# EAGLE board LineSensorAdapter (EAGLE 6.6.0)
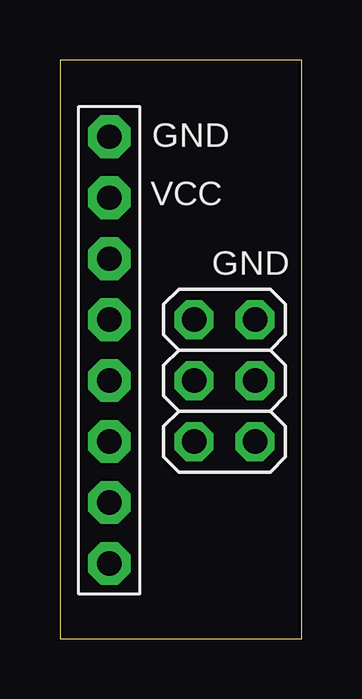
[diagram p0: board, top side]
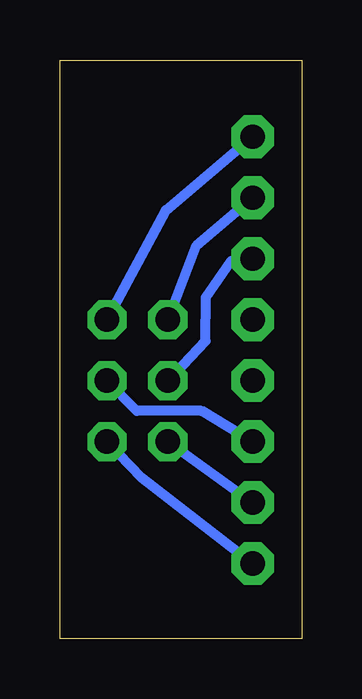
[diagram p1: board, bottom side, seen from below]

Size 10.1 x 24.12 mm. Coordinates in mm from the lower left corner, seen from the top.
Outline: 0,0 10.1,0 10.1,24.12 0,24.12 0,0
Copper layers (1*16): Top 0.035mm / dielectric 1.5mm / Bottom 0.035mm
Design rules "DFRobot_Eagle_Rule_v0.4": minimum track width 6mil, minimum drill 12mil, track to track 6mil, track to pad 6mil, pad to pad 6mil, via to via 6mil, smd to smd 0mil, copper to edge 10mil, drill to drill 10mil, minimum pad ring 12mil, minimum via ring 8mil, stop-mask expansion 2mil, vias tented up to drill 25mil, thermal gap 10mil

## Footprints (pad centres in the part's own frame; a part is rotated, then mirrored left to right if it is on the bottom)
2X03 = drill 1.016 octagon: 1 -2.54,-1.27; 2 -2.54,1.27; 3 0,-1.27; 4 0,1.27; 5 2.54,-1.27; 6 2.54,1.27
1X08-BIG = drill 1.016 pad 1.778 octagon: 1 -8.89,0; 2 -6.35,0; 3 -3.81,0; 4 -1.27,0; 5 1.27,0; 6 3.81,0; 7 6.35,0; 8 8.89,0

## Placement (x,y rotation side)
ANALOG  [2X03]  6.87,10.76 270 top
JP1  [1X08-BIG]  2.06,12.03 270 top

## Library data of the parts
ANALOG = pinhead
JP1 = adafruit

## Nets
A0: ANALOG.3 JP1.3
A1: ANALOG.4 JP1.6
A2: ANALOG.5 JP1.7
A3: ANALOG.6 JP1.8
GND: ANALOG.2 JP1.1
VCC: ANALOG.1 JP1.2

## Tracks (layer width: path | path; a pad name or v marks a point on that pad's centre or on a via)
A0
  Bottom 0.406: ANALOG.3 4.02,12.42 4.01,14.23 2.96,15.74 JP1.3
A1
  Bottom 0.406: JP1.6 4.2,9.5 6.9,9.5 ANALOG.4
A2
  Bottom 0.406: JP1.7 ANALOG.5
A3
  Bottom 0.406: JP1.8 6.67,6.7 ANALOG.6
GND
  Bottom 0.406: ANALOG.2 5.68,17.86 JP1.1
VCC
  Bottom 0.406: ANALOG.1 4.4,16.4 JP1.2

## Text on the board
tNames: GND | VCC | GND